# EAGLE board t2313_attiny_fusebit_hv-doctor_V2_pa2_dil (EAGLE 5.04)
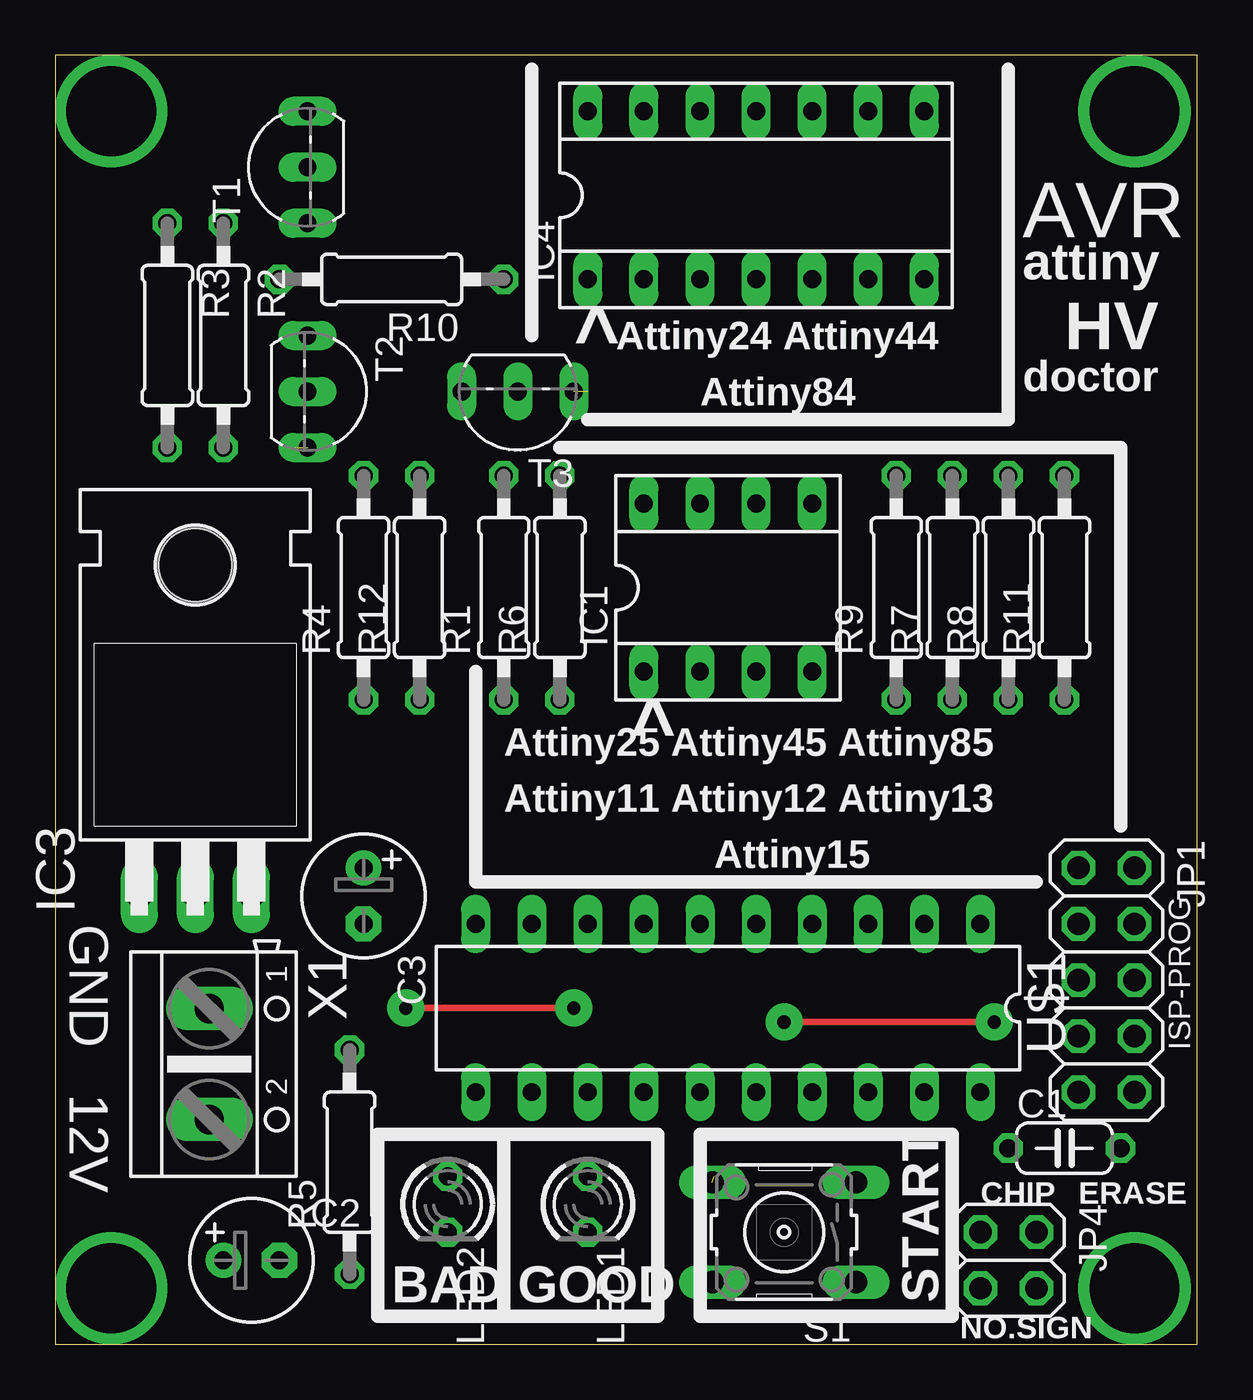
[diagram p0: board, top side]
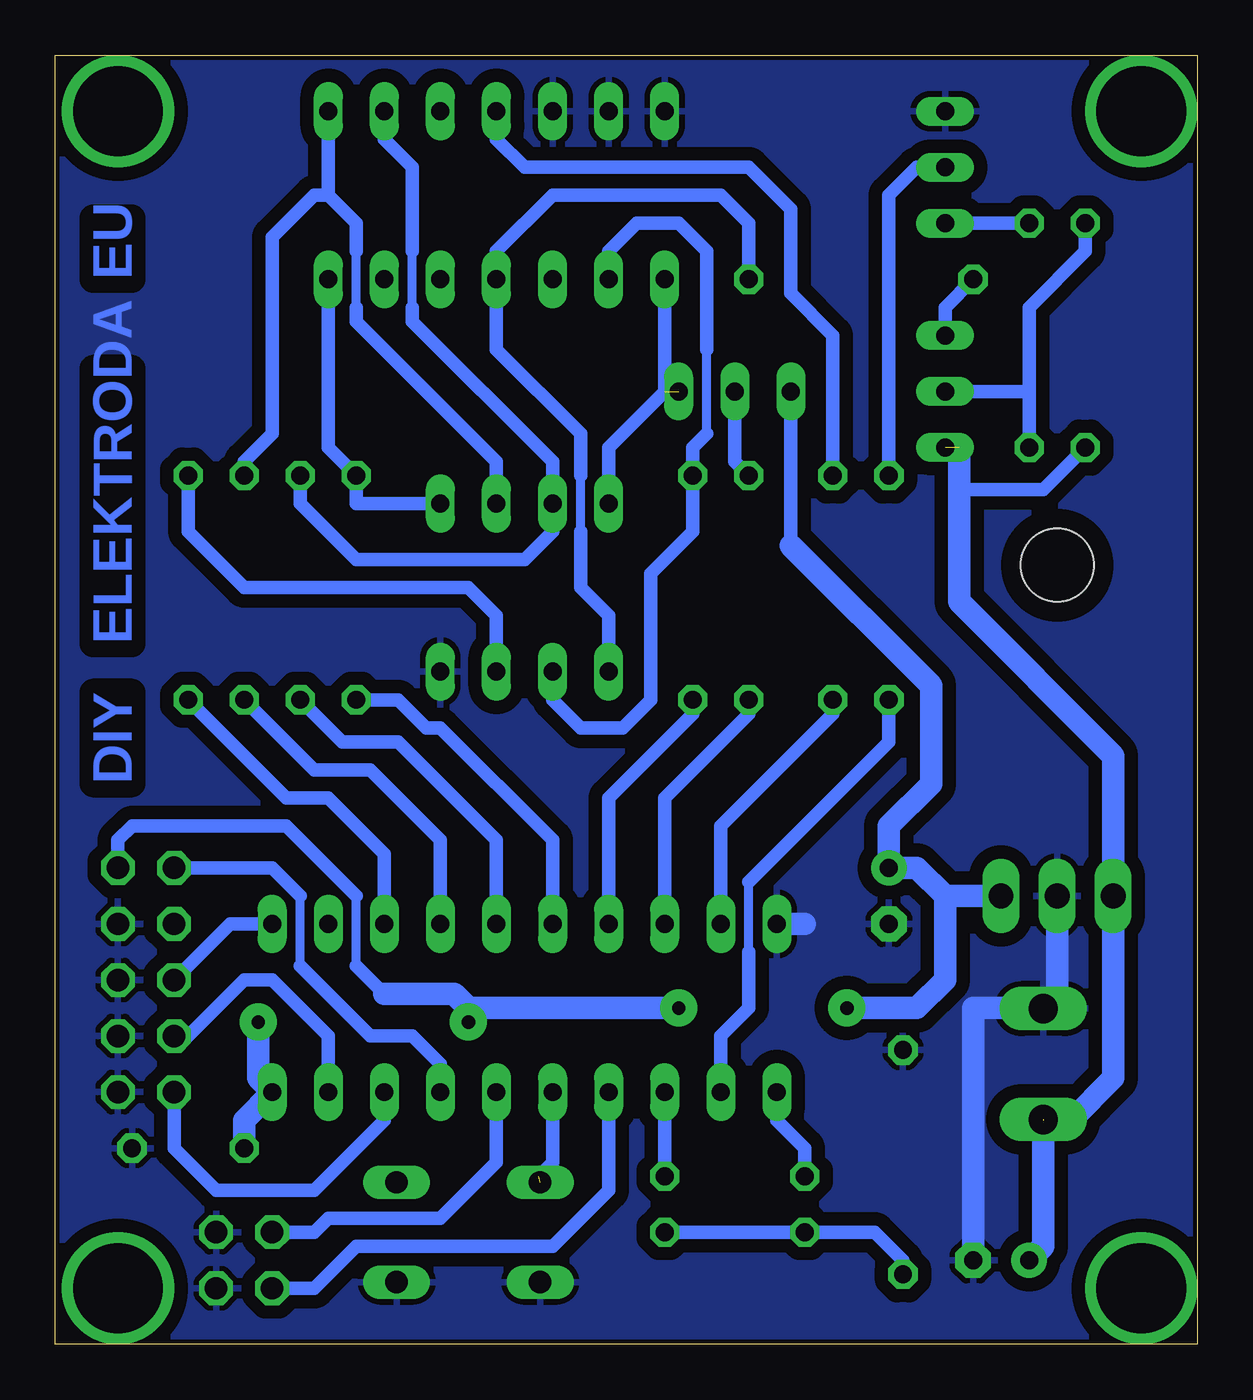
[diagram p1: board, bottom side, seen from below]

Size 51.74 x 58.41 mm. Coordinates in mm from the lower left corner, seen from the top.
Outline: 0,0 51.74,0 51.74,58.41 0,58.41 0,0
Copper layers (1*16): Top 0.035mm / dielectric 1.5mm / Bottom 0.035mm
Design rules "default *": minimum track width 10mil, minimum drill 24mil, track to track 24mil, track to pad 24mil, pad to pad 24mil, via to via 24mil, smd to smd 24mil, copper to edge 8mil, drill to drill 8mil, minimum pad ring 10mil, minimum via ring 8mil, stop-mask expansion 4mil, vias tented up to drill 0mil, thermal gap 10mil

## Footprints (pad centres in the part's own frame; a part is rotated, then mirrored left to right if it is on the bottom)
C050-024X044 = drill 0.813 octagon: 1 -2.54,0; 2 2.54,0
E2,5-6 = drill 0.813 pad 1.6 round: + -1.27,0 | drill 0.813 pad 1.6 octagon: - 1.27,0
SOCKED-08 = drill 0.813 long: 1 -3.81,-3.81; 2 -1.27,-3.81; 3 1.27,-3.81; 4 3.81,-3.81; 5 3.81,3.81; 6 1.27,3.81; 7 -1.27,3.81; 8 -3.81,3.81
TO220H = drill 1.118 long: 1 -2.54,-10.16; 2 0,-10.16; 3 2.54,-10.16 | hole 3.302: 0,4.826
SOCKED-14 = drill 0.813 long: 1 -7.62,-3.81; 2 -5.08,-3.81; 3 -2.54,-3.81; 4 0,-3.81; 5 2.54,-3.81; 6 5.08,-3.81; 7 7.62,-3.81; 8 7.62,3.81; 9 5.08,3.81; 10 2.54,3.81; 11 0,3.81; 12 -2.54,3.81; 13 -5.08,3.81; 14 -7.62,3.81
2X05 = drill 1.016 octagon: 1 -5.08,-1.27; 2 -5.08,1.27; 3 -2.54,-1.27; 4 -2.54,1.27; 5 0,-1.27; 6 0,1.27; 7 2.54,-1.27; 8 2.54,1.27; 9 5.08,-1.27; 10 5.08,1.27
2X02 = drill 1.016 octagon: 1 -1.27,-1.27; 2 -1.27,1.27; 3 1.27,-1.27; 4 1.27,1.27
LED3MM = drill 0.813 octagon: A -1.27,0; K 1.27,0
0207/10 = drill 0.813 octagon: 1 -5.08,0; 2 5.08,0
B3F-10XX = drill 1.016 long: 1 -3.251,2.261; 2 3.251,2.261; 3 -3.251,-2.261; 4 3.251,-2.261
TO92-EBC = drill 0.813 long: B 0,-1.27; C -2.54,-1.27; E 2.54,-1.27
DIL20 = drill 0.813 long: 1 -11.43,-3.81; 2 -8.89,-3.81; 3 -6.35,-3.81; 4 -3.81,-3.81; 5 -1.27,-3.81; 6 1.27,-3.81; 7 3.81,-3.81; 8 6.35,-3.81; 9 8.89,-3.81; 10 11.43,-3.81; 11 11.43,3.81; 12 8.89,3.81; 13 6.35,3.81; 14 3.81,3.81; 15 1.27,3.81; 16 -1.27,3.81; 17 -3.81,3.81; 18 -6.35,3.81; 19 -8.89,3.81; 20 -11.43,3.81
AK500/2 = drill 1.321 long: 1 -2.515,0; 2 2.515,0

## Placement (x,y rotation side)
C1  100nF  [C050-024X044]  45.72,8.89 0 top
C2  100uF  [E2,5-6]  8.89,3.81 0 top
C3  10uF  [E2,5-6]  13.97,20.32 270 top
IC1  [SOCKED-08]  30.48,34.29 0 top
IC3  7805T  [TO220H]  6.35,30.48 0 top
IC4  [SOCKED-14]  31.75,52.07 0 top
JP1  [2X05]  47.62,16.51 270 top
JP4  [2X02]  43.18,3.81 270 top
LED1  [LED3MM]  24.13,6.35 270 top
LED2  [LED3MM]  17.78,6.35 270 top
R1  4K7  [0207/10]  20.32,34.29 90 top
R2  1K  [0207/10]  7.62,45.72 270 top
R3  10K  [0207/10]  5.08,45.72 270 top
R4  1K  [0207/10]  13.97,34.29 90 top
R5  330  [0207/10]  13.34,8.26 90 top
R6  330  [0207/10]  22.86,34.29 90 top
R7  330  [0207/10]  40.64,34.29 90 top
R8  330  [0207/10]  43.18,34.29 90 top
R9  330  [0207/10]  38.1,34.29 90 top
R10  330  [0207/10]  15.24,48.26 180 top
R11  330  [0207/10]  45.72,34.29 90 top
R12  330  [0207/10]  16.51,34.29 90 top
S1  [B3F-10XX]  33.02,5.08 180 top
T1  BC547  [TO92-EBC]  10.16,53.34 90 top
T2  BC557  [TO92-EBC]  12.7,43.18 270 top
T3  BC557  [TO92-EBC]  20.95,41.91 180 top
U$1  ATINY2313  [DIL20]  30.48,15.24 180 top
X1  GND 12V  [AK500/2]  6.99,12.7 270 top

## Library data of the parts
C1-C3 R1-R12 = rcl
IC1 IC4 = ic-package
IC3 = linear
JP1 JP4 = pinhead
LED1 LED2 = led
S1 = switch-omron
T1-T3 = transistor
U$1 = avr-6
X1 = con-ptr500

## Nets
+12V: C2.+ IC3.1 R3.2 T2.E X1.2
GND: C1.2 C2.- C3.- IC1.4 IC3.2 IC4.12 IC4.13 IC4.14 JP1.4 JP1.6 JP1.8 JP1.10 JP4.2 JP4.4 R5.2 S1.1 S1.2 T1.E U$1.10 X1.1
N$1: R4.1 U$1.12
N$2: R1.1 U$1.8
N$3: R7.1 U$1.5
N$4: R8.1 U$1.4
N$5: LED1.K LED2.K R5.1
N$6: R1.2 T3.B
N$7: IC1.1 IC4.4 R10.1
N$8: R2.2 R3.1 T2.B
N$9: R2.1 T1.C
N$10: R4.2 T1.B
N$11: LED1.A U$1.13
N$12: JP1.5 U$1.1
N$13: JP1.7 U$1.19
N$14: JP1.9 U$1.18
N$15: JP1.1 U$1.17
N$16: IC4.11 R12.2
N$18: JP4.1 U$1.16
N$19: R6.1 U$1.7
N$20: LED2.A U$1.11
N$21: R12.1 U$1.9
N$22: R9.1 U$1.6
N$23: JP4.3 U$1.14
N$24: S1.4 U$1.15
N$25: R10.2 T2.C
N$26: IC1.3 R11.2
N$27: R11.1 U$1.3
N$29: IC1.8 IC4.1 T3.C
SCI: IC1.2 IC4.2 R6.2
SDI: IC1.5 IC4.7 R9.2
SDO: IC1.7 IC4.9 R7.2
SII: IC1.6 IC4.8 R8.2
VCC: C1.1 C3.+ IC3.3 JP1.2 T3.E U$1.20

## Tracks (layer width: path | path; a pad name or v marks a point on that pad's centre or on a via)
+12V  (2 unrouted)
  Bottom 0.61: IC3.1 3.81,19.68 | 10.79,38.73 6.99,38.73 R3.2
  Bottom 1.016: C2.+ 6.99,4.45 6.99,10.16 5.71,10.16 3.81,12.06 IC3.1 3.81,26.67 10.79,33.66 10.79,38.73 10.79,40.64
GND
  Bottom 0.61: IC3.2 6.35,21.59
  Bottom 1.016: IC3.2 6.35,15.24 10.16,15.24 C2.- | U$1.10 17.78,19.05
  pour Bottom: 0,58.42 52.07,58.42 52.07,0 0,0
N$1
  Bottom 0.406: 20.32,17.78 20.32,20.95
  Bottom 0.61: 20.32,17.78 20.32,15.24 21.59,13.97 U$1.12 | R4.1 13.97,27.3 20.32,20.95
N$2
  Bottom 0.61: R1.1 20.32,28.57 24.13,24.77 U$1.8
N$3
  Bottom 0.61: R7.1 38.73,27.3 36.2,27.3 31.75,22.86 U$1.5
N$4
  Bottom 0.61: R8.1 40.01,26.04 37.47,26.04 34.29,22.86 U$1.4
N$5
  Bottom 0.61: R5.1 13.34,3.81 14.61,5.08 LED2.K LED1.K
N$6
  Bottom 0.61: R1.2 20.95,40.01 T3.B
N$7
  Bottom 0.406: 27.94,36.83 27.94,39.37
  Bottom 0.61: IC1.1 26.67,33.02 27.94,34.29 27.94,36.83 | 27.94,39.37 27.94,41.27 31.75,45.09 IC4.4 31.75,49.53 29.21,52.07 21.59,52.07 20.32,50.8 R10.1
N$8
  Bottom 0.61: R3.1 5.08,49.53 7.62,46.99 7.62,43.18 | R2.2 7.62,43.18 | 7.62,43.18 T2.B
N$9
  Bottom 0.61: R2.1 T1.C
N$10
  Bottom 0.61: R4.2 13.97,52.07 12.7,53.34 T1.B
N$11
  Bottom 0.61: LED1.A 24.13,10.16 U$1.13
N$12
  Bottom 0.61: U$1.1 43.81,19.05 JP1.5
N$13
  Bottom 0.61: U$1.19 39.37,13.97 41.91,16.51 43.18,16.51 45.72,13.97 JP1.7
N$14
  Bottom 0.61: U$1.18 36.83,10.16 40.01,6.99 44.45,6.99 46.35,8.89 JP1.9
N$15
  Bottom 0.406: 40.64,17.14 40.64,20.32
  Bottom 0.61: U$1.17 34.29,12.7 35.56,13.97 37.47,13.97 40.64,17.14 | 40.64,20.32 41.91,21.59 JP1.1
N$16
  Bottom 0.61: IC4.11 31.75,54.61 30.48,53.34 20.32,53.34 18.41,51.44 18.41,47.62 16.51,45.72 R12.2
N$17  (via drill 4.06 pad 5.08)
  other vias: 2.54,55.88
N$18
  Bottom 0.61: U$1.16 31.75,8.26 34.29,5.71 39.37,5.71 40.01,5.08 JP4.1
N$19
  Bottom 0.61: R6.1 22.86,28.57 26.67,24.77 U$1.7
N$20
  Bottom 0.61: LED2.A 17.78,8.89 19.05,10.16 U$1.11
N$21
  Bottom 0.61: R12.1 16.51,28.57 21.59,23.5 U$1.9
N$22
  Bottom 0.61: R9.1 36.2,29.21 34.92,27.94 34.29,27.94 29.21,22.86 U$1.6
N$23
  Bottom 0.61: U$1.14 26.67,6.99 29.21,4.45 38.1,4.45 40.01,2.54 JP4.3
N$24  (1 unrouted)
  Bottom 0.61: 29.84,7.62 29.21,8.26 U$1.15
N$25
  Bottom 0.61: R10.2 11.43,46.99 T2.C
N$26
  Bottom 0.61: IC1.3 31.75,33.02 33.02,34.29 43.18,34.29 45.72,36.83 R11.2
N$27
  Bottom 0.61: R11.1 41.27,24.77 39.37,24.77 36.83,22.23 U$1.3
N$28  (via drill 4.06 pad 5.08)
  other vias: 2.54,2.54
N$29  (1 unrouted)
  Bottom 0.61: IC4.1 24.13,43.18 26.67,40.64 IC1.8
N$32  (via drill 4.06 pad 5.08)
  other vias: 48.9,2.54
N$33  (via drill 4.06 pad 5.08)
  other vias: 48.9,55.88
SCI
  Bottom 0.406: 22.23,41.27 22.23,45.09
  Bottom 0.61: IC4.2 26.67,49.53 25.4,50.8 23.5,50.8 22.23,49.53 22.23,45.09 | 22.23,41.27 22.86,40.64 R6.2 22.86,36.83 24.77,34.92 24.77,29.21 26.04,27.94 27.94,27.94 29.21,29.21 IC1.2
SDI
  Bottom 0.61: IC4.7 39.37,40.64 R9.2 38.1,38.1 IC1.5
SDO
  Bottom 0.406: 35.56,46.99 35.56,49.53
  Bottom 0.61: IC4.9 36.83,54.61 35.56,53.34 35.56,49.53 | 35.56,46.99 35.56,46.35 29.21,40.01 IC1.7 29.21,36.83 30.48,35.56 38.1,35.56 40.64,38.1 R7.2
SII
  Bottom 0.406: 38.1,46.99 38.1,49.53
  Bottom 0.61: 39.37,52.07 IC4.8 | 39.37,52.07 38.1,50.8 38.1,49.53 | 38.1,46.99 38.1,46.35 31.75,40.01 IC1.6 | 39.37,52.07 40.01,52.07 41.91,50.16 41.91,41.27 43.18,40.01 R8.2
VCC  (via drill 0.6 pad 1.68)
  Top 0.305: v33.02,14.61 v42.55,14.61 | v15.88,15.24 v23.5,15.24
  Bottom 0.406: 38.1,17.14 38.1,20.32
  Bottom 0.61: 36.83,15.88 38.1,17.14 | 38.1,20.32 41.27,23.5 48.26,23.5 48.9,22.86 JP1.2 | 18.41,36.2 T3.E
  Bottom 1.016: 18.41,36.2 12.06,29.84 12.06,25.4 13.97,23.5 C3.+ 12.7,21.59 11.43,20.32 | 33.02,15.24 33.66,15.88 36.83,15.88 | v23.5,15.24 33.02,15.24 | 11.43,20.32 IC3.3 | 33.02,15.24 v33.02,14.61 | v42.55,14.61 42.55,12.06 U$1.20 43.18,10.16 C1.1 | 11.43,20.32 11.43,16.51 12.7,15.24 v15.88,15.24

## Text on the board
Bottom: EU | ELEKTRODA | DIY
tPlace: AVR | attiny | Attiny24 Attiny44 | HV | ^ | Attiny84 | doctor | Attiny25 Attiny45 Attiny85 | ^ | Attiny11 Attiny12 Attiny13 | Attiny15 | ISP-PROG | CHIP | ERASE | BAD | GOOD | START | NO.SIGN